# Altium PCB DS_Motor1.0.PcbDoc
Units mil, origin at the board's own origin, x right, y up, seen from the top; angles counter-clockwise.
Board outline 6000 x 4000 mil, 2 copper layers (Top Layer, Bottom Layer); 51 components, 35 nets, 140 pads, 162 vias.
Unrouted connection lines stored in the file: 96.
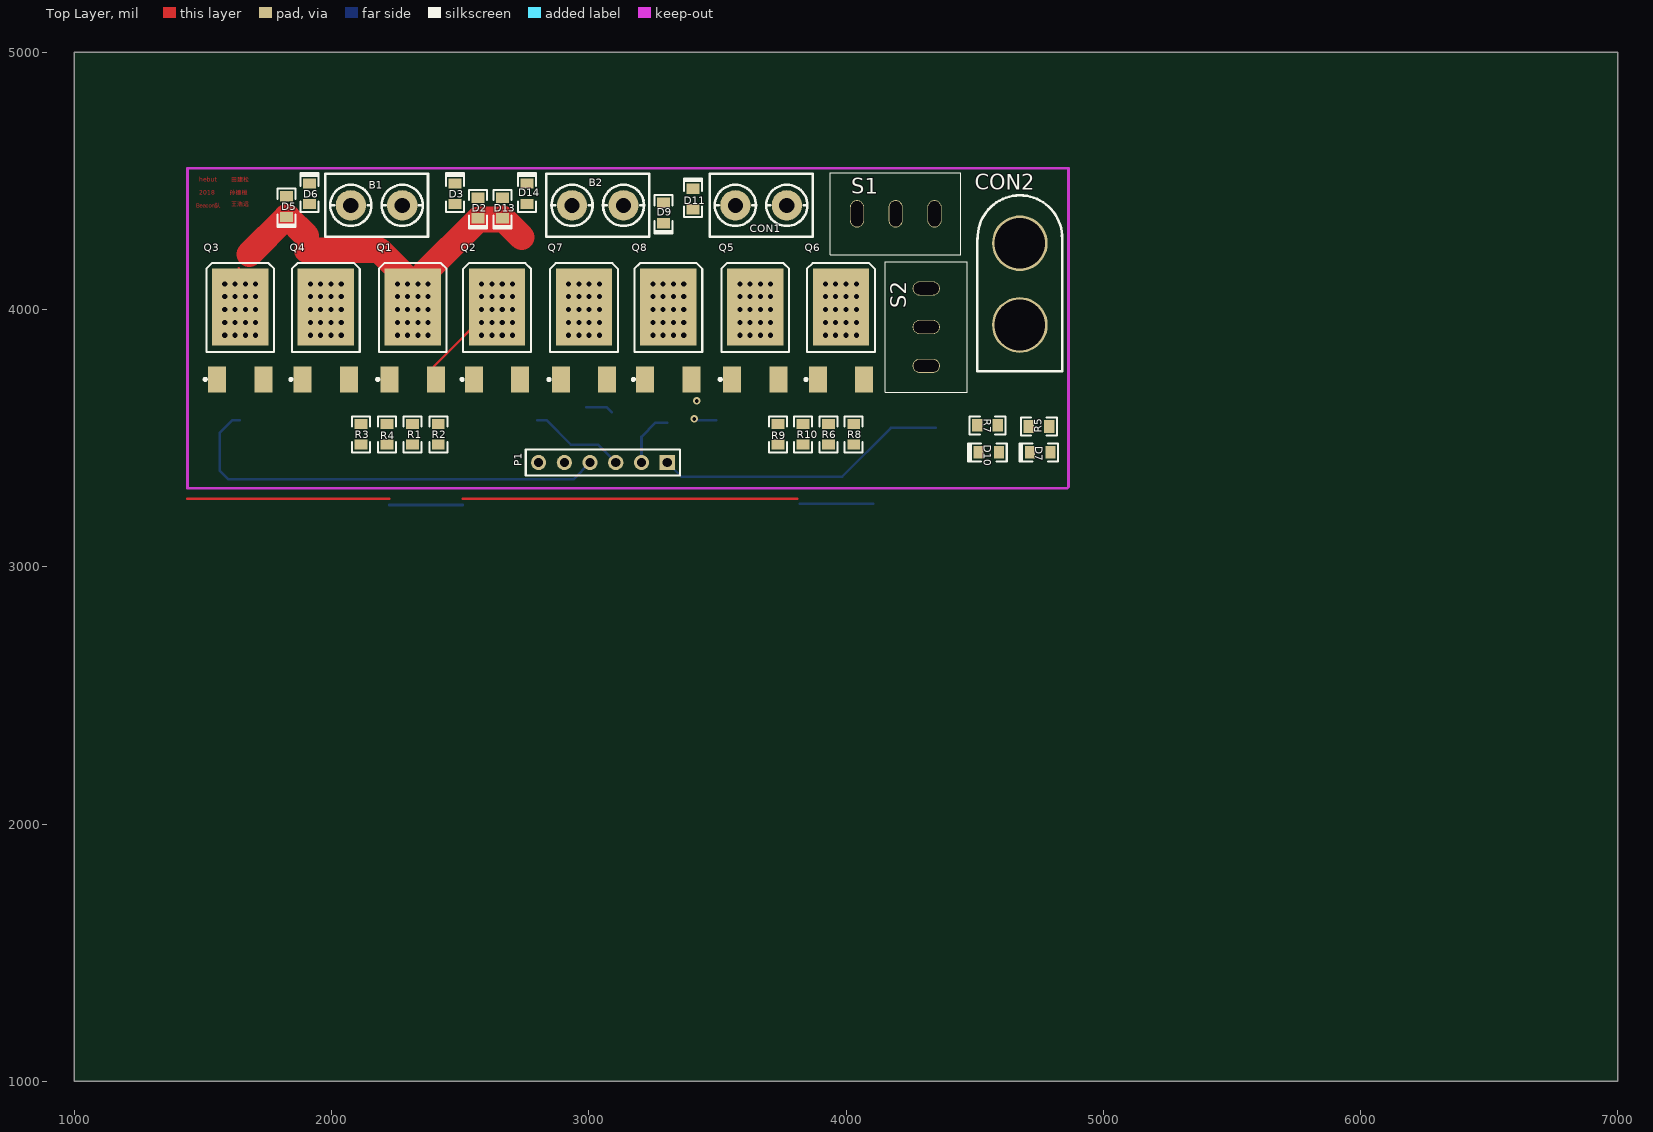
[diagram p0: Top Layer view]
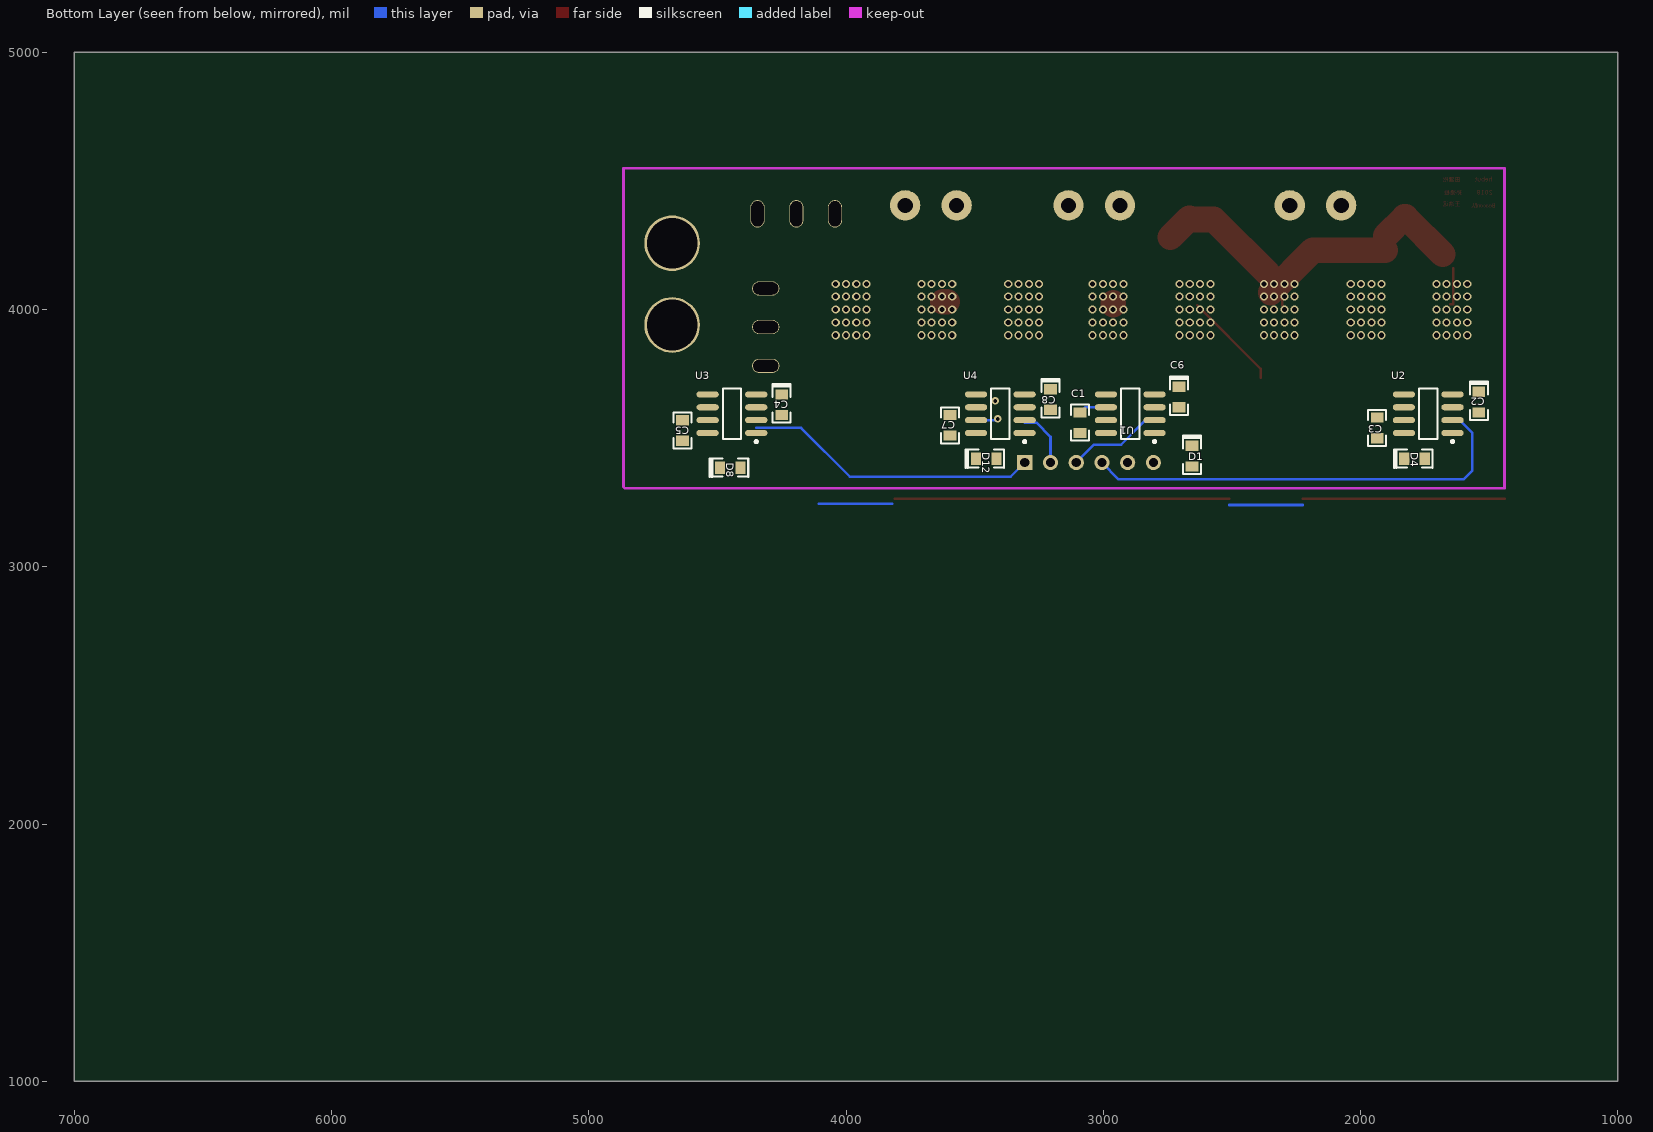
[diagram p1: Bottom Layer view, seen from below]

## Layer stack, top to bottom
Top Layer: signal copper 1.4
Dielectric: dielectric 12.6, FR-4, Dk 4.8
Bottom Layer: signal copper 1.4

## Board outline
1000,1000 7000,1000 7000,5000 1000,5000

## Design rules (kind name [scope] priority, off if disabled: settings)
Clearance [All] p1: gap=10
PolygonConnect [All] p1: connectstyle=Relief reliefconductorwidth=10 reliefentries=4 polygonreliefangle="90 Angle" airgapwidth=10
RoutingVias [All] p1: holewidth=28 width=50 viastyle="Through Hole" minholewidth=28 minwidth=50 maxholewidth=28 maxwidth=50
SolderMaskExpansion [All] p1: expansion=4
Width [All] p1: maxlimit=200 minlimit=10 preferedwidth=10 minimp=50.000000 maximp=50.000000 favimp=50.000000
28 further rules are at their usual default settings.

## Components (designator, comment, footprint, x,y, rotation, side; value= is the part's Value field where it differs from the comment)
B1 "Motor" KF301-2P 2175,4405 r90 top
B2 "Motor" KF301-2P 3035,4405 r90 top
C1 "1.5uF" 0805 3090,3560 r90 bottom
C2 "10uF" 0805LED 1540,3640 r90 bottom
C3 "1.5uF" 0805 1935,3540 r90 bottom
C4 "10uF" 0805LED 4250,3630 r90 bottom
C5 "1.5uF" 0805 4635,3530 r90 bottom
C6 "10uF" 0805LED 2705,3660 r90 bottom
C7 "1.5uF" 0805 3595,3550 r90 bottom
C8 "10uF" 0805LED 3205,3650 r90 bottom
CON1 "PoweIn" KF301-2P 3670,4405 r270 top
CON2 "PowerIn" DIZUO 4665,4080 r0 top
D1 "IN5819" 0805LED 2655,3430 r90 bottom
D2 "IN5819" 0805LED 2570,4395 r270 top
D3 "IN5819" 0805LED 2480,4450 r90 top
D4 "IN5819" 0805LED 1790,3420 r0 bottom
D5 "IN5819" 0805LED 1825,4400 r270 top
D6 "IN5819" 0805LED 1915,4450 r90 top
D7 "LED0" 0805LED 4755,3445 r180 top
D8 "IN5819" 0805LED 4450,3385 r0 bottom
D9 "IN5819" 0805LED 3290,4375 r270 top
D10 "RED" 0805LED 4555,3445 r180 top
D11 "IN5819" 0805LED 3405,4430 r90 top
D12 "IN5819" 0805LED 3455,3420 r0 bottom
D13 "IN5819" 0805LED 2665,4395 r270 top
D14 "IN5819" 0805LED 2760,4450 r90 top
P1 "Motor" HDR1X6 3305,3405 r180 top
Q1 "LR7843" LR7843 2315.71,3870 r270 top
Q2 "LR7843" LR7843 2643.57,3870 r270 top
Q3 "LR7843" LR7843 1645,3870 r270 top
Q4 "LR7843" LR7843 1977.86,3870 r270 top
Q5 "LR7843" LR7843 3647.14,3870 r270 top
Q6 "LR7843" LR7843 3980,3870 r270 top
Q7 "LR7843" LR7843 2981.43,3870 r270 top
Q8 "LR7843" LR7843 3309.29,3870 r270 top
R1 "20R" 0805 2315,3515 r90 top
R2 "20R" 0805 2415,3515 r90 top
R3 "20R" 0805 2115,3515 r90 top
R4 "20R" 0805 2215,3515 r90 top
R5 "10k" 0805 4750,3545 r0 top
R6 "20R" 0805 3931.67,3515 r90 top
R7 "Res2" 0805 4550,3550 r180 top
R8 "20R" 0805 4030,3515 r90 top
R9 "20R" 0805 3735,3515 r90 top
R10 "20R" 0805 3833.33,3515 r90 top
S1 "motor" SWITCH-MID 4425,4250 r180 top
S2 "zk" SWITCH-MID 4190,3700 r90 top
U1 "IR2104S" IR2104S 2895,3595 r0 bottom
U2 "IR2104S" IR2104S 1736.67,3595 r0 bottom
U3 "IR2104S" IR2104S 4443.33,3595 r0 bottom
U4 "IR2104S" IR2104S 3400,3595 r0 bottom

## Footprints (in the part's own frame and the unit in brackets; to place one, negate y for a bottom-side part, rotate by r counter-clockwise, add the part's x,y. Pads: shape width x height; smd on the part's side, far side on the other; paste and mask are expansions set on the pad)
0805 [mil]
  rect 40x50 smd: 1(-40,0) 2(40,0)
  silkscreen extent -70,-35 70,35
0805LED [mil]
  rect 40x50 smd: 1(-40,0) 2(40,0)
  silkscreen extent -70,-35 80,35
DIZUO [mm]
  round 5.5 hole 5: 1(0.279,4.521) 2(0.279,-3.556)
  silkscreen extent -3.91,-8.13 4.45,9.25
HDR1X6 [mm] "Connector; Header; 6 Position"
  rect 1.5x1.5 hole 0.9: 1(0,0)
  round 1.5 hole 0.9: 2(2.54,0) 3(5.08,0) 4(7.62,0) 5(10.16,0) 6(12.7,0)
  silkscreen extent -1.27,-1.27 13.97,1.27
IR2104S [mm]
  oval 2.2x0.6 smd: 1(-2.4,1.905) 2(-2.4,0.635) 3(-2.4,-0.635) 4(-2.4,-1.905) 5(2.4,-1.905) 6(2.4,-0.635) 7(2.4,0.635) 8(2.4,1.905)
  silkscreen extent -2.52,-2.5 0.9,2.88, body extent -2,-2.5 2,2.5, height 1.55
KF301-2P [mm]
  round 3 hole 1.5: 1(0,-2.54) 2(0,2.54)
  silkscreen extent -3.1,-5.08 3.1,5.08
LR7843 [mm]
  rect 2.54x1.778 smd: 1(3.6,-2.28) 3(3.6,2.28)
  rect 7.6x5.55 smd: 2(-3.556,0)
  silkscreen extent -7.87,-3.58 3.72,3.35
SWITCH-MID [mm]
  oval 1.4x2.7 hole 1.2 slot 2.5 at 90 deg: 1(9.703,-3.099) 2(5.893,-3.099) ""(2.057,-3.099)
  silkscreen extent -0.56,-7.16 12.34,0.94

## Part data
B1 B2: library part "Motor Servo", "Servo Motor"
C1 C3 C5 C7: library part "Cap Semi", "Capacitor (Semiconductor SIM Model)"
C2 C4 C6 C8: library part "Cap Pol3", "Polarized Capacitor (Surface Mount)"
CON1 CON2: library part "Header 2", "Header, 2-Pin"
D1 D2 D3 D4 D5 D6 D8 D9 D11 D12 D13 D14: library part Diode, "Default Diode"
D7: "Typical INFRARED GaAs LED"
D10: library part LED2, "Typical RED, GREEN, YELLOW, AMBER GaAs LED"
Q1 Q2 Q3 Q4 Q5 Q6 Q7 Q8: library part NMOS-2, "N-Channel Power MOSFET"
R1 R2 R3 R4 R5 R6 R8 R9 R10: library part Res2, "Resistor"
R7: "Resistor"
S1 S2: library part SW-SPST, "Single-Pole, Single-Throw Switch"

## Via types
v1: diameter 31.5, hole 19.68, Top Layer to Bottom Layer, 160 vias
v2: diameter 30, hole 15, Top Layer to Bottom Layer, 2 vias

## Nets (pads, with @x,y where several pads share a name; then routed paths per layer and width w, separated by ;. In a path a pad name is that pad's centre, name@x,y a point inside that pad or via, vN(x,y) a via of type N, cw(c..) or ccw(c..) an arc to the next point about the centre after c; other vN are vias at no path point)
12V: C2.1 C4.1 C6.1 C8.1 D1.1 D4.1 D8.1 D12.1 P1.5 U1.1 U1.3 U2.1 U2.3 U3.1 U3.3 U4.1 U4.3
GND: C2.2 C4.2 C6.2 C8.2 CON1.2 CON2.2 D3.1 D6.1 D7.2 D10.2 D11.1 D14.1 P1.6 Q2.3 Q4.3 Q6.3 Q8.3 U1.4 U2.4 U3.4 U4.4
"MOTOR1 IN1": P1.1 U3.2 | length 1145.3
  Bottom Layer w10: P1.1 3360,3350 3985,3350 4175,3540 4348.85,3540
"MOTOR1 IN2": P1.2 U4.2 | length 223.3
  Bottom Layer w10: P1.2 3205,3505 3260,3560 U4.2@3305.51,3560
"MOTOR1 IN3": P1.4 U2.2 | length 1724.3
  Bottom Layer w10: U2.2 1615,3570 1565,3520 1565,3375 1600,3340 2940,3340 P1.4
"MOTOR1 IN4": P1.3 U1.2 | length 372.8
  Bottom Layer w10: U1.2 2835,3570 2930,3475 3035,3475 P1.3
NetB1_1: B1.1 C1.2 D2.1 D3.2 Q1.3 Q2.2 U1.6 | length 492.7
  Top Layer w10: Q1.3@2387.62,3734.27 2387.62,3769.34 Q2.2@2634.29,4016
  Bottom Layer w10: U1.6 3070,3620 C1.2
  other v1: 2583.57,3900 2623.57,3900 2663.57,3900 2703.57,3900 2583.57,3950 2623.57,3950 2663.57,3950 2703.57,3950 2583.57,4000 2623.57,4000 2663.57,4000 2703.57,4000 2583.57,4050 2623.57,4050 2663.57,4050 2703.57,4050 2583.57,4100 2623.57,4100 2663.57,4100 2703.57,4100
NetB1_2: B1.2 C3.2 D5.1 D6.2 Q3.3 Q4.2 U2.6
  other v1: 1917.86,3900 1957.86,3900 1997.86,3900 2037.86,3900 1917.86,3950 1957.86,3950 1997.86,3950 2037.86,3950 1917.86,4000 1957.86,4000 1997.86,4000 2037.86,4000 1917.86,4050 1957.86,4050 1997.86,4050 2037.86,4050 1917.86,4100 1957.86,4100 1997.86,4100 2037.86,4100
NetB2_1: B2.1 C5.2 D9.1 D11.2 Q5.3 Q6.2 U3.6
  other v1: 3920,3900 3960,3900 4000,3900 4040,3900 3920,3950 3960,3950 4000,3950 4040,3950 3920,4000 3960,4000 4000,4000 4040,4000 3920,4050 3960,4050 4000,4050 4040,4050 3920,4100 3960,4100 4000,4100 4040,4100
NetB2_2: B2.2 C7.2 D13.1 D14.2 Q7.3 Q8.2 U4.6
  other v1: 3249.29,3900 3289.29,3900 3329.29,3900 3369.29,3900 3249.29,3950 3289.29,3950 3329.29,3950 3369.29,3950 3249.29,4000 3289.29,4000 3329.29,4000 3369.29,4000 3249.29,4050 3289.29,4050 3329.29,4050 3369.29,4050 3249.29,4100 3289.29,4100 3329.29,4100 3369.29,4100
NetC1_1: C1.1 D1.2 U1.8
NetC3_1: C3.1 D4.2 U2.8
NetC5_1: C5.1 D8.2 U3.8
NetC7_1: C7.1 D12.2 U4.8
NetCON2_1: CON2.1 S2.1
NetD7_1: D7.1 R5.2
NetD10_1: D10.1 R7.1
NetQ1_1: Q1.1 R1.2
NetQ2_1: Q2.1 R2.2
NetQ3_1: Q3.1 R3.2
NetQ4_1: Q4.1 R4.2
NetQ5_1: Q5.1 R6.2
NetQ6_1: Q6.1 R8.2
NetQ7_1: Q7.1 R9.2
NetQ8_1: Q8.1 R10.2
NetR1_1: R1.1 U1.7
NetR2_1: R2.1 U1.5
NetR3_1: R3.1 U2.7
NetR4_1: R4.1 U2.5
NetR6_1: R6.1 U3.7
NetR8_1: R8.1 U3.5
NetR9_1: R9.1 U4.7 | length 74.5
  Bottom Layer w10: v2@3420,3570 U4.7
  other v2: 3410,3575
NetR10_1: R10.1 U4.5
  other v2: 3420,3645
VBAT: D2.2 D5.2 D9.2 D13.2 Q1.2 Q3.2 Q5.2 Q7.2 R5.1 S1.2 | length 1563.3
  Top Layer w10: Q3.2@1640,4021 1640,4160 ; Q3.2@1645,4021 Q3.2@1651,4021 ; D5.2 D5.2@1829,4360 ; Q1.2@2304,4016 Q1.2@2304,4084 ; Q7.2@2960.71,4016 Q7.2@2961,4016
  Top Layer w100: 1680,4215 D5.2 ; D5.2@1829,4360 1902,4287 ; 1904,4230 2185,4230 Q1.2@2349,4066 ; Q1.2@2359,4139 2570,4350 2660,4350 D13.2 2739.39,4280.61 ; Q7.2@2960.71,4018.28 Q7.2@2960.71,4025.71 ; Q5.2@3606.85,4030 Q5.2@3623.57,4030
  other v1: 1585,3900 1625,3900 1665,3900 1705,3900 2255.71,3900 2295.71,3900 2335.71,3900 2375.71,3900 2921.43,3900 2961.43,3900 3001.43,3900 3041.43,3900 3587.14,3900 3627.14,3900 3667.14,3900 3707.14,3900 1585,3950 1625,3950 1665,3950 1705,3950 2255.71,3950 2295.71,3950 2335.71,3950 2375.71,3950 2921.43,3950 2961.43,3950 3001.43,3950 3041.43,3950 3587.14,3950 3627.14,3950 3667.14,3950 3707.14,3950 1585,4000 1625,4000 1665,4000 1705,4000 2255.71,4000 2295.71,4000 2335.71,4000 2375.71,4000 2921.43,4000 2961.43,4000 3001.43,4000 3041.43,4000 3587.14,4000 3627.14,4000 3667.14,4000 3707.14,4000 1585,4050 1625,4050 1665,4050 1705,4050 2255.71,4050 2295.71,4050 2335.71,4050 2375.71,4050 2921.43,4050 2961.43,4050 3001.43,4050 3041.43,4050 3587.14,4050 3627.14,4050 3667.14,4050 3707.14,4050 1585,4100 1625,4100 1665,4100 1705,4100 2255.71,4100 2295.71,4100 2335.71,4100 2375.71,4100 2921.43,4100 2961.43,4100 3001.43,4100 3041.43,4100 3587.14,4100 3627.14,4100 3667.14,4100 3707.14,4100
ZK_VCC: CON1.1 R7.2 S1.1 S2.2
pads on no net: S1. S2.
copper on no net: | length 2655
  Top Layer w10: 1440,3265 2225,3265 ; 2510,3265 3810,3265
  Bottom Layer w10: 2225,3240 2510,3240 ; 3820,3245 4105,3245

## Keep-outs
Keep-Out Layer:
  lines w10: 1440,3305 1440,4550 3225,4550 4865,4550 4865,3310 4860,3305 1440,3305

## Other copper
Top Layer:
  text "hebut" at 1485,4490 h30
  text "田建松" at 1610,4490 h30
  text "2018" at 1485,4440 h30
  text "孙德桓" at 1605,4440 h30
  text "王浩远" at 1610,4395 h30
  text "Beacon队" at 1475,4390 h30